# EAGLE board Becca Sap Flow Sensor MOD2 (EAGLE 9.6.2)
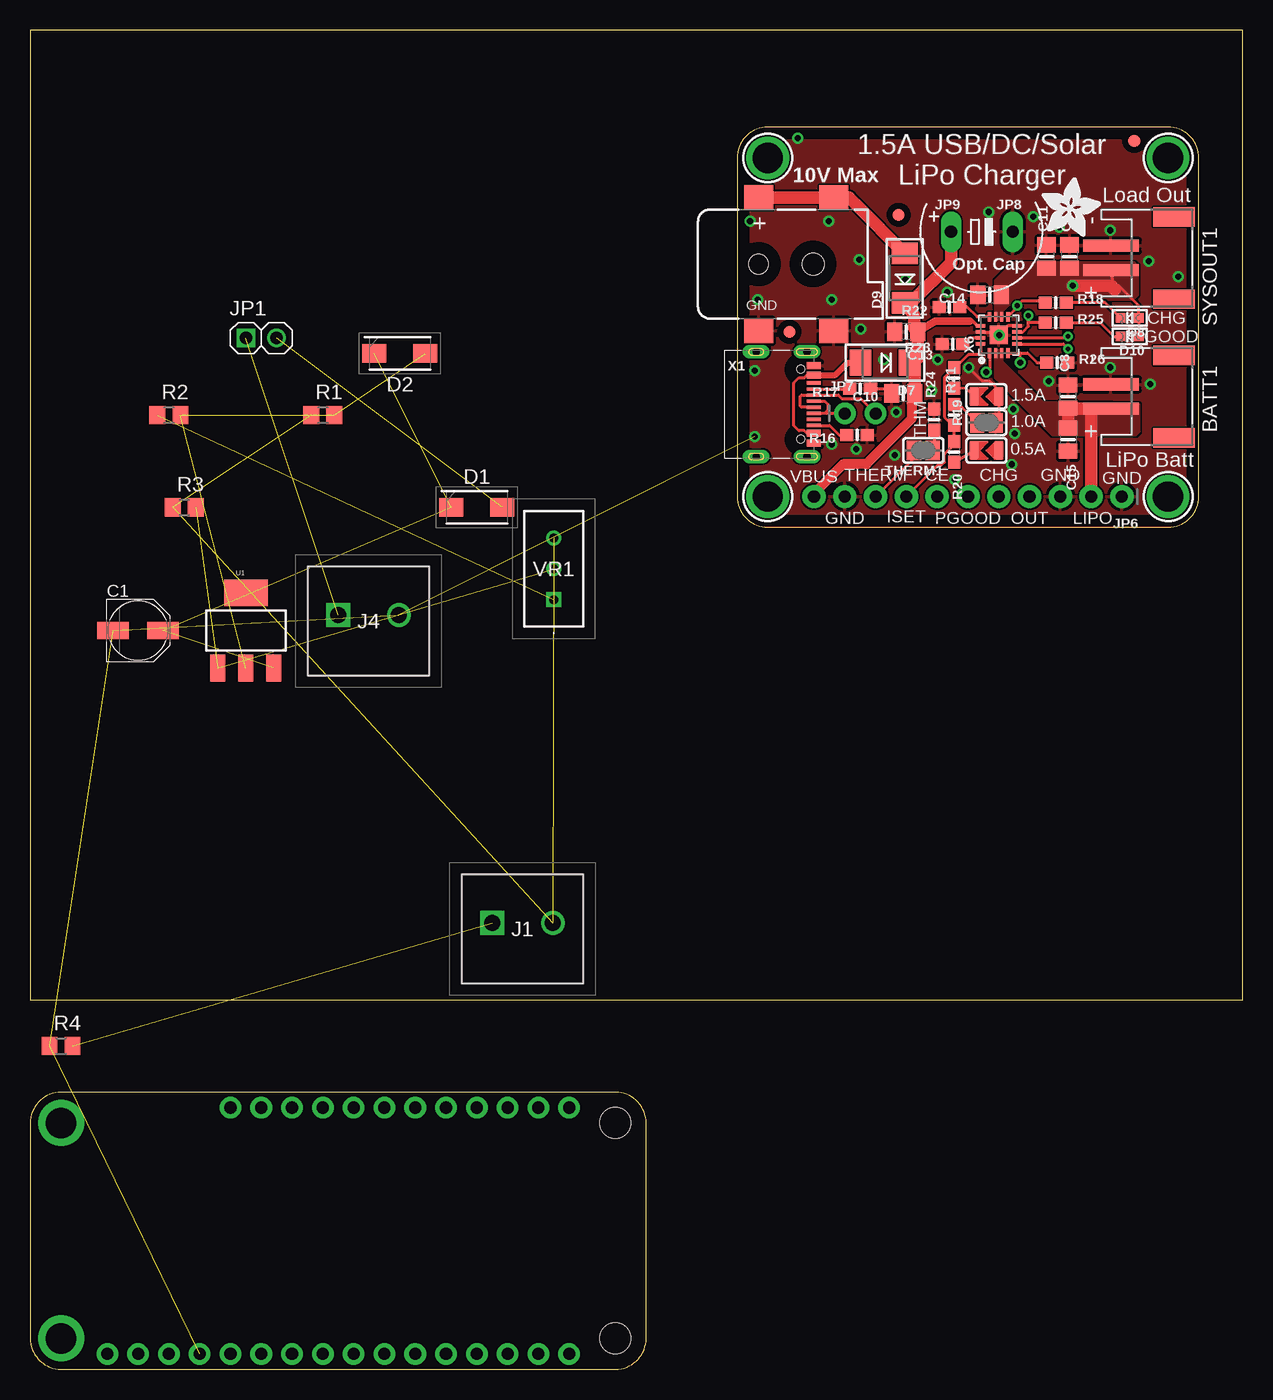
[diagram p0: board, top side]
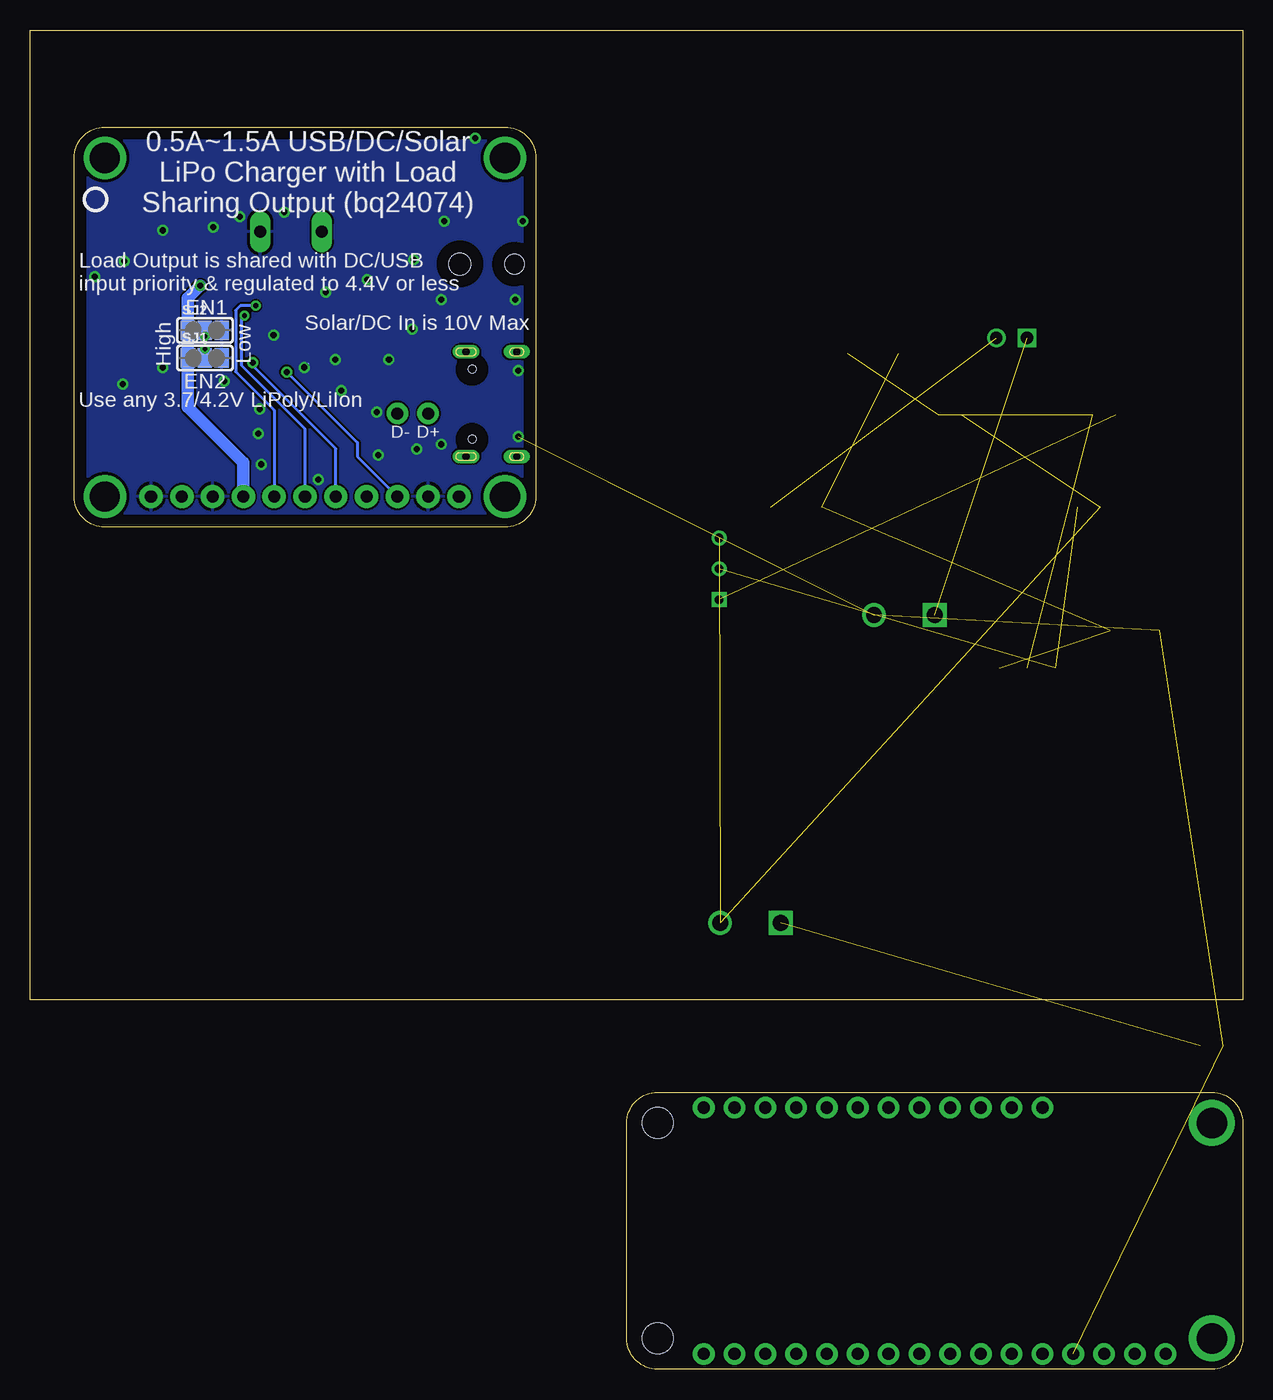
[diagram p1: board, bottom side, seen from below]

Size 100 x 80 mm. Coordinates in mm from the lower left corner, seen from the top.
Outline: 0,0 100,0 100,80 0,80 0,0
Outline: 58.29,69.47 58.29,41.53 arc90 60.83,38.99 93.85,38.99 arc90 96.39,41.53 96.39,69.47 arc90 93.85,72.01 60.83,72.01 arc90 58.29,69.47
Copper layers (1*16): Top 0.035mm / dielectric 0.15mm / Bottom 0.035mm
Design rules "default": minimum track width 6mil, minimum drill 0.35mm, track to track 6mil, track to pad 6mil, pad to pad 6mil, via to via 6mil, smd to smd 6mil, copper to edge 40mil, drill to drill 6mil, minimum pad ring 10mil, minimum via ring 8mil, stop-mask expansion 4mil, vias tented up to drill 0mil, thermal gap 10mil

## Footprints (pad centres in the part's own frame; a part is rotated, then mirrored left to right if it is on the bottom)
SOLDERJUMPER_ARROW_NOPASTE = smd 0.762 x 1.524: 1 -1.016,0; 2 1.016,0
SOLDERJUMPER_CLOSEDWIRE = smd 1.168 x 1.6: 1 -0.762,0; 2 0.762,0 | smd 0.635 x 0.203: WIRE 0,0
JST-PH-2-SMT-RA = smd 1 x 4.6: 1 1,-3.7; 2 -1,-3.7 | smd 1.6 x 3.4: NC1 -3.4,1.5; NC2 3.4,1.5
PANASONIC_C = smd 2.6 x 1.4: + 2.05,0; - -2.05,0
0805-NO = smd 1.24 x 1.5: 1 -0.95,0; 2 0.95,0
DIOM5027X250N = smd 2 x 1.55: 1 -2.1,0; 2 2.1,0
SMADIODE = smd 1.778 x 2.159: A 2.019,0; C -2.045,0
CHIPLED_0603 = smd 0.8 x 0.8: A 0,-0.75; C 0,0.75
FIDUCIAL_1MM = smd 1 x 1: 1 0,0
1935161 = drill 1.3 pad 1.95 square: 1 0,0 | drill 1.3 pad 1.95: 2 5,0
HDR2X1 = drill 1.016 square: 1 0,0 | drill 1.016: 2 2.54,0
1X11_ROUND_76 = drill 1 pad 1.93: 1 -12.7,0; 2 -10.16,0; 3 -7.62,0; 4 -5.08,0; 5 -2.54,0; 6 0,0; 7 2.54,0; 8 5.08,0; 9 7.62,0; 10 10.16,0; 11 12.7,0
1X02_ROUND = drill 1 pad 1.778: 1 -1.27,0; 2 1.27,0
1X01_OVAL = drill 1 pad 1.676 long: 1 0,0
FEATHERWING = drill 1 pad 1.778: 1 6.35,1.27; 2 8.89,1.27; 3 11.43,1.27; 4 13.97,1.27; 5 16.51,1.27; 6 19.05,1.27; 7 21.59,1.27; 8 24.13,1.27; 9 26.67,1.27; 10 29.21,1.27; 11 31.75,1.27; 12 34.29,1.27; 13 36.83,1.27; 14 39.37,1.27; 15 41.91,1.27; 16 44.45,1.27; 17 44.45,21.59; 18 41.91,21.59; 19 39.37,21.59; 20 36.83,21.59; 21 34.29,21.59; 22 31.75,21.59; 23 29.21,21.59; 24 26.67,21.59; 25 24.13,21.59; 26 21.59,21.59; 27 19.05,21.59; 28 16.51,21.59 | drill 2.5 pad 3.81: P$1 2.54,20.32; P$2 2.54,2.54 | hole 2.54: 48.26,20.32; 48.26,2.54
R0805 = smd 1.3 x 1.5: 1 -0.95,0; 2 0.95,0
0603-NO = smd 1.075 x 1: 1 -0.85,0; 2 0.85,0
SOLDERJUMPER_2WAY_OPEN_NOPASTE = smd 1.168 x 1.6: 1 -1.397,0; 2 0,0; 3 1.397,0
SOT223 = smd 1.219 x 2.235: 1 -2.311,-3.099; 2 0,-3.099; 3 2.311,-3.099 | smd 3.6 x 2.2: 4 0,3.099
MOUNTINGHOLE_2.5_PLATED = drill 2.5 pad 3.2: P$1 0,0
3296W1102RLF = drill 0.71 pad 1.217 square: 1 0,0 | drill 0.71 pad 1.217: 2 0,2.54; 3 0,5.08
USB_C_CUSB31-CFM2AX-01-X = smd 0.575 x 1.15: A1B12 -3.2,3.545; A4B9 -2.4,3.545; B1A12 3.2,3.545; B4A9 2.4,3.545 | smd 0.275 x 1.15: A5 -1.25,3.545; A6 -0.25,3.545; A7 0.25,3.545; A8 1.25,3.545; B5 1.75,3.545; B6 0.75,3.545; B7 -0.75,3.545; B8 -1.75,3.545 | drill 0.6 pad 1 long: M1 -4.32,2.97; M2 4.32,2.97; M3 -4.32,-1.21; M4 4.32,-1.21 | hole 0.65: 2.89,2.47; -2.89,2.47
DCJACK_2MM_SMT = smd 2.4 x 2: 1 0,5.5; 1' 6.2,5.5; 2 0,-5.5; 3 6.2,-5.5 | hole 1.6: 0,0 | hole 1.8: 4.5,0
QFN16_3MM = smd 0.8 x 0.28: 1 -1.5,0.75; 2 -1.5,0.25; 3 -1.5,-0.25; 4 -1.5,-0.75; 9 1.5,-0.75; 10 1.5,-0.25; 11 1.5,0.25; 12 1.5,0.75 | smd 0.28 x 0.8: 5 -0.75,-1.5; 6 -0.25,-1.5; 7 0.25,-1.5; 8 0.75,-1.5; 13 0.75,1.5; 14 0.25,1.5; 15 -0.25,1.5; 16 -0.75,1.5 | smd 1.5 x 1.5: THERMAL 0,0

## Placement (x,y rotation side)
0.5A1  [SOLDERJUMPER_ARROW_NOPASTE]  78.87,45.34 180 top
1.5A1  [SOLDERJUMPER_ARROW_NOPASTE]  78.87,49.78 180 top
1A1  [SOLDERJUMPER_CLOSEDWIRE]  78.87,47.62 180 top
BATT1  JST 2PH  [JST-PH-2-SMT-RA]  92.84,49.78 270 top
C1  220u, 25V  [PANASONIC_C]  8.89,30.48 0 top
C8  10uF  [0805-NO]  85.6,49.78 90 top
C10  10uF  [0805-NO]  72.01,50.04 180 top
C11  10uF  [0805-NO]  83.82,61.34 90 top
C12  10uF  [0805-NO]  85.72,61.34 90 top
C13  10uF  [0805-NO]  72.26,55.12 180 top
C14  10uF  [0805-NO]  79.12,58.17 180 top
C15  10uF  [0805-NO]  85.6,46.23 270 top
D1  S1A  [DIOM5027X250N]  36.83,40.64 0 top
D2  S1A  [DIOM5027X250N]  30.48,53.34 0 top
D7  SK34A  [SMADIODE]  70.48,52.58 180 top
D8  RED  [CHIPLED_0603]  90.68,56.26 90 top
D9  SK34A  [SMADIODE]  72.14,59.56 90 top
D10  GREEN  [CHIPLED_0603]  90.68,54.74 90 top
FID4  FIDUCIAL_1MM  [FIDUCIAL_1MM]  71.63,64.77 0 top
FID5  FIDUCIAL_1MM  [FIDUCIAL_1MM]  91.06,70.87 0 top
FID6  FIDUCIAL_1MM  [FIDUCIAL_1MM]  62.61,55.12 0 top
J1  1935161  [1935161]  38.1,6.35 0 top
J4  1935161  [1935161]  25.4,31.75 0 top
JP1  JUMPER  [HDR2X1]  17.78,54.61 0 top
JP6  [1X11_ROUND_76]  77.34,41.53 180 top
JP7  [1X02_ROUND]  68.45,48.39 0 top
JP8  [1X01_OVAL]  81.03,63.37 0 top
JP9  [1X01_OVAL]  75.95,63.37 0 top
MS1  FEATHERWING  [FEATHERWING]  0,-30.48 0 top  (outside the outline)
R1  12 Ohm, 5%  [R0805]  24.13,48.26 0 top
R2  47 Ohm, 5%  [R0805]  11.43,48.26 0 top
R3  100 Ohm, 5%  [R0805]  12.7,40.64 0 top
R4  R of 2 Thermos  [R0805]  2.54,-3.81 0 top  (outside the outline)
R16  5.1K  [0603-NO]  68.2,46.61 180 top
R17  5.1K  [0603-NO]  68.45,50.42 180 top
R18  10K  [0603-NO]  84.58,57.53 0 top
R19  590  [0603-NO]  76.2,51.31 270 top
R20  2K  [0603-NO]  76.2,45.21 270 top
R21  1K  [0603-NO]  76.2,48.26 90 top
R22  1K  [0603-NO]  75.82,57.15 180 top
R23  10K  [0603-NO]  76.07,54.1 180 top
R24  10K  [0603-NO]  74.55,47.88 90 top
R25  10K  [0603-NO]  84.58,55.88 0 top
R26  10K  [0603-NO]  84.71,52.58 0 top
SJ1  [SOLDERJUMPER_2WAY_OPEN_NOPASTE]  85.6,52.96 0 bottom
SJ2  [SOLDERJUMPER_2WAY_OPEN_NOPASTE]  85.6,55.24 0 bottom
SYSOUT1  JST 2PH  [JST-PH-2-SMT-RA]  92.84,61.21 270 top
THERM1  [SOLDERJUMPER_CLOSEDWIRE]  73.66,45.34 180 top
U1  V_REG_317SMD  [SOT223]  17.78,30.48 0 top
U$1  MOUNTINGHOLE2.5  [MOUNTINGHOLE_2.5_PLATED]  60.83,41.53 0 top
U$2  MOUNTINGHOLE2.5  [MOUNTINGHOLE_2.5_PLATED]  60.83,69.47 0 top
U$5  MOUNTINGHOLE2.5  [MOUNTINGHOLE_2.5_PLATED]  93.85,69.47 0 top
U$6  MOUNTINGHOLE2.5  [MOUNTINGHOLE_2.5_PLATED]  93.85,41.53 0 top
U$14  [ADAFRUIT_5MM]  83.44,62.99 0 top
U$18  [PCBFEAT-REV-040]  94.61,66.04 0 bottom
VR1  3296W-1-102RLF  [3296W1102RLF]  43.18,33.02 0 top
X1  USB Type C  [USB_C_CUSB31-CFM2AX-01-X]  61.09,49.15 270 top
X3  2.1mm DC  [DCJACK_2MM_SMT]  60.07,60.71 0 top
X6  BQ24074  [QFN16_3MM]  79.88,54.86 90 top

## Library data of the parts
0.5A1 1.5A1 FID4-FID6 U$1 U$2 U$5 U$6 = microbuilder; BOM: EXCLUDE
1A1 C8 C10-C15 D7-D10 JP6-JP9 R16-R26 SJ1 SJ2 THERM1 U$14 U$18 X1 X3 = microbuilder
BATT1 MS1 SYSOUT1 = adafruit
C1 = rcl; SPICEPREFIX: C
D1 D2 = S1A; DESCRIPTION: Rectifier Diode Switching 50V 1A 1500ns 2-Pin SMA T/R; HEIGHT: 2.5mm; MANUFACTURER_NAME: Diotec; MANUFACTURER_PART_NUMBER: S1A; MOUSER_PART_NUMBER: 637-S1A; MOUSER_PRICE-STOCK: https://www.mouser.co.uk/ProductDetail/Diotec-Semiconductor/S1A?qs=OlC7AqGiEDlqVjQP70PTqA%3D%3D
J1 J4 = 1935161; DESCRIPTION: Phoenix Contact COMBICON PT PCB Terminal Block, 2 Way/Pole, Screw Terminals, 26 14 AWG Through Hole, Nylon; HEIGHT: 11.55mm; MANUFACTURER_NAME: Phoenix Contact; MANUFACTURER_PART_NUMBER: 1935161; MOUSER_PART_NUMBER: 651-1935161; MOUSER_PRICE-STOCK: https://www.mouser.co.uk/ProductDetail/Phoenix-Contact/1935161?qs=W3wJikR1%252BS6eKzfFl8Rbew%3D%3D
JP1 = 6P1_EVB
R1-R4 = rcl; SPICEPREFIX: R
U1 = SparkFun-IC-Power
VR1 = 3296W-1-102RLF; DESCRIPTION: 1 kOhms 0.5W, 1/2W PC Pins Through Hole Trimmer Potentiometer Cermet 25.0 Turn Top Adjustment; HEIGHT: 11.8mm; MANUFACTURER_NAME: Bourns; MANUFACTURER_PART_NUMBER: 3296W-1-102RLF; MOUSER_PART_NUMBER: 652-3296W-1-102RLF; MOUSER_PRICE-STOCK: https://www.mouser.co.uk/ProductDetail/Bourns/3296W-1-102RLF?qs=oM%2FE6%2FUWOpR5bwX1MfrWeA%3D%3D
X6 = adafruit_power

## Nets
!CE1: JP6.7 R26.1 X6.4
!CHG1: JP6.5 R18.1 X6.9
!PGOOD1: JP6.6 R25.1 X6.7
CC3: R16.2 X1.B5
CC4: R17.2 X1.A5
D+1: JP7.1 X1.A6 X1.B6
D-1: JP7.2 X1.A7 X1.B7
EN3: SJ2.2 X6.6
EN4: SJ1.2 X6.5
GND: 0.5A1.1 1.5A1.1 1A1.1 BATT1.2 C1.- C8.2 C10.2 C11.2 C12.2 C13.2 C14.2 C15.2 J4.2 JP6.1 JP6.3 JP6.10 JP8.1 MS1.4 R4.1 R16.1 R17.1 R22.2 R23.2 R24.2 R26.2 SJ1.3 SJ2.3 SYSOUT1.2 X1.A1B12 X1.B1A12 X3.2 X3.3 X6.8 X6.14 X6.THERMAL
ILIM1: R22.1 X6.12
ISET1: JP6.8 R19.1 R20.1 R21.1 X6.16
ITERM1: R23.1 X6.15
N$1: D1.2 JP1.2
N$2: C1.+ D1.1 D2.1 U1.3
N$4: D2.2 R1.2 R2.2 U1.2
N$6: J1.1 R4.2
N$9: R3.2 U1.1 VR1.2
N$10: R2.1 VR1.1
N$11: J1.2 R1.1 R3.1 VR1.3
N$15: D9.A X3.1 X3.1'
N$16: 1.5A1.2 R19.2
N$17: 0.5A1.2 R20.2
N$18: 1A1.2 R21.2
N$19: D8.C R18.2
N$20: D10.C R25.2
N$23: R24.1 THERM1.1
OUT: C11.1 C12.1 C14.1 D8.A D10.A JP6.4 SJ1.1 SJ2.1 SYSOUT1.1 X6.10 X6.11
S$4: D7.A X1.A4B9 X1.B4A9
S$5: C10.1 C13.1 D7.C D9.C JP6.11 JP9.1 X6.13
S$7: JP6.9 THERM1.2 X6.1
VCC: J4.1 JP1.1
VLIPO: BATT1.1 C8.1 C15.1 JP6.2 X6.2 X6.3

## Tracks (layer width: path | path; a pad name or v marks a point on that pad's centre or on a via)
!CE1  (via drill 0.5)
  Top 0.254: X6.4 81.66,53.36 | 81.66,53.36 82.27,53.36 83.06,52.58 R26.1 | v81.66,52.58 81.66,53.36
  Bottom 0.254: JP6.7 74.8,45.47 81.66,52.32 v81.66,52.58
!CHG1  (via drill 0.39)
  Top 0.254: X6.9 81.41,57.14 v81.41,57.28 81.79,57.66 83.73,57.66 R18.1
  Bottom 0.254: v81.41,57.28 82.68,57.28 83.06,56.9 83.06,51.82 79.88,48.64 JP6.5
!PGOOD1  (via drill 0.39)
  Top 0.254: X6.7 81.87,55.11 82.33,55.57 v82.33,56.46 82.33,55.88 R25.1
  Bottom 0.254: JP6.6 77.34,47.12 82.58,52.35 82.58,56.21 v82.33,56.46
CC3
  Top 0.254: X1.B5 65.92,47.4 66.71,46.61 R16.2
CC4
  Top 0.254: X1.A5 67.58,50.4 R17.2
D+1
  Top 0.254: X1.A6 65.54,49.4 65.79,49.15 65.79,48.64 65.54,48.4 | X1.B6 65.54,48.4 | 65.54,48.4 JP7.1
D-1
  Top 0.254: X1.A7 63.62,48.9 63.5,49.02 63.5,49.78 63.63,49.91 64.62,49.91 X1.B7 66.65,49.9 66.94,49.61 68.5,49.61 JP7.2
EN3  (via drill 0.39)
  Top 0.254: X6.6 85.47,54.61 v85.6,54.74
  Bottom 0.254: SJ2.2 v85.6,54.74
EN4  (via drill 0.39)
  Top 0.254: X6.5 85.2,54.11 v85.6,53.72
  Bottom 0.254: SJ1.2 v85.6,53.72
GND  (via drill 0.5)  (4 unrouted)
  Top 0.254: X6.8 80.63,55.61 X6.THERMAL 79.63,55.11 X6.14 | 1A1.1 79.88,47.88 1.5A1.1 79.88,50.29 79.12,51.05 78.53,51.05 v77.4,52.19 | R17.1 70.68,50.42 C10.2
  Bottom 0.254: v77.4,52.19 77.09,52.49
  other vias: 76.26,42.91 81.21,46.72 81.08,48.76 84,51.04 89.08,52.19 92.38,50.79 89.08,63.49 92.26,60.95 84.89,63.74 82.73,64.63 79.05,65.01 75.62,58.41 70.41,52.82 71.43,48.5 66.1,45.84 68.13,45.45 80.95,44.18 94.67,59.68 72.19,59.42 59.75,46.47 79.94,54.85 74.86,52.82 59.75,51.93 66.1,57.77 60,57.77 65.84,64.25 59.36,64.25 63.3,71.11 68.51,55.36 68.38,61.08 74.35,50.28 71.3,44.95
  pour Top (rank 3): 58.29,38.99 96.39,38.99 96.39,72.01 58.29,72.01
  pour Bottom (rank 3): 58.29,38.99 96.39,38.99 96.39,72.01 58.29,72.01
ILIM1
  Top 0.254: X6.12 78.09,56.36 77.3,57.15 R22.1
ISET1
  Top 0.254: X6.16 78.38,53.35 78.26,53.23 77.37,53.23 76.3,52.16 R19.1 75.39,51.35 75.39,48.09 76.1,47.38 | R21.1 76.09,47.52 76.1,47.38 | 76.1,47.38 76.17,46.67 76.2,46.11 | 76.2,46.11 R20.1 | JP6.8 74.84,44.11 75.13,44.11 75.39,44.37 75.39,45.03 76.2,45.83 76.2,46.11
ITERM1
  Top 0.254: X6.15 77.44,54.61 R23.1
N$1  (1 unrouted)
N$2  (3 unrouted)
N$4  (3 unrouted)
N$6  (1 unrouted)
N$9  (2 unrouted)
N$10  (1 unrouted)
N$11  (3 unrouted)
N$15
  Top 1.016: D9.A 68.08,65.64 67.56,66.21 X3.1' X3.1
N$16
  Top 0.254: 1.5A1.2 77.2,50.43 R19.2
N$17
  Top 0.254: R20.2 0.5A1.2
N$18
  Top 0.254: R21.2 76.85,48.88 1A1.2
N$19
  Top 0.254: D8.C 88.66,57.53 R18.2
N$20
  Top 0.254: R25.2 88.27,55.88 89.41,54.74 D10.C
N$21
  Bottom 0.254: 85.85,52.96 86.74,52.96
N$22
  Bottom 0.254: 85.34,55.24 84.45,55.24
N$23
  Top 0.254: THERM1.1 74.55,45.47 R24.1
OUT  (via drill 0.5)
  Top 0.254: 89.47,58.61 SYSOUT1.1 | D10.A D8.A 91.43,57.29 89.79,58.93 87.76,58.93
  Top 1.016: v85.98,58.93 87.76,58.93 89.15,58.93 89.47,58.61
  Bottom 0.254: SJ1.1 87,53.85
  Bottom 1.016: JP6.4 82.42,44.32 87,48.9 SJ1.1 | v85.98,58.93 87,57.91 SJ2.1 87,53.85
  pour Top (no thermals): 80.14,56.13 79.63,56.13 79.63,59.37 81.1,60.83 91.06,60.83 91.31,60.58 91.31,58.17 90.93,57.78 81.15,57.78 80.14,56.77
S$4
  Top 0.254: X1.A4B9 64.06,51.55 63.85,51.33 63.4,51.33 62.99,50.93 62.99,47.37 63.4,46.97 63.85,46.97 64.06,46.75 X1.B4A9
  Top 0.508: D7.A 67.44,52.58 66.41,51.55 X1.A4B9
S$5
  Top 0.305: X6.13 78.13,55.61 77.74,56.01 77.47,56.01
  Top 0.61: 77.47,56.01 74.66,56.01 C13.1
  Top 0.813: C10.1 72.96,49.53 72.7,49.28 72.7,47.94 68.96,44.2 67.06,44.2 64.64,41.78 JP6.11
  Top 1.016: JP9.1 75.95,60.83 72.63,57.52 D9.C 72.9,56.45 72.9,55.43 C13.1 73.21,52.96 D7.C 72.96,52.45 C10.1
S$7  (via drill 0.5)
  Top 0.254: X6.1 79.13,52.1 v78.84,51.81 | THERM1.2 72.9,44.7 JP6.9
  Bottom 0.254: v78.84,51.81 73.03,45.99 73.03,44.83 JP6.9
VCC  (1 unrouted)
VLIPO
  Top 1.016: JP6.2 87.5,48.64 87.65,48.78 BATT1.1 85.65,48.78 C8.1 C15.1
  pour Top (no thermals): 79.63,53.59 80.14,53.59 80.14,52.7 83.57,49.28 85.09,49.28 85.22,49.15 91.44,49.15 91.44,46.86 91.19,46.61 84.33,46.61 79.63,51.31

## Text on the board
tPlace: 1.5A USB/DC/Solar / LiPo Charger | 10V Max | Load Out | Opt. Cap | CHG | GOOD | 1.5A | THM | 1.0A | 0.5A | LiPo Batt | VBUS | THERM | CE | CHG | GND | GND | GND | ISET | PGOOD | OUT | LIPO
bPlace: 0.5A~1.5A USB/DC/Solar / LiPo Charger with Load / Sharing Output (bq24074) | Load Output is shared with DC/USB / input priority & regulated to 4.4V or less | EN1 | Solar/DC In is 10V Max | Low | High | EN2 | Use any 3.7/4.2V LiPoly/LiIon | D+ | D-